# Altium PCB YAPCBBC_draft_placement.PcbDoc
Units mm, origin at the board's own origin, x right, y up, seen from the top; angles counter-clockwise.
Board outline 84 x 55 mm, 2 copper layers (Top Layer, Bottom Layer); 35 components, 23 nets, 103 pads, 7 vias.
Unrouted connection lines stored in the file: 64.
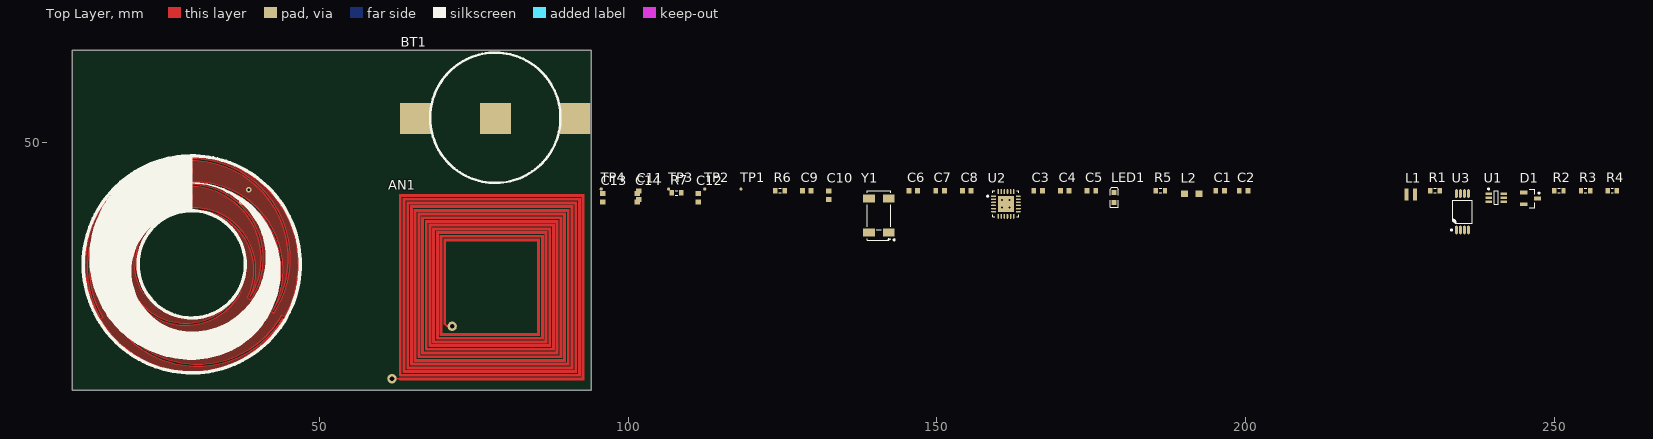
[diagram p0: Top Layer view]
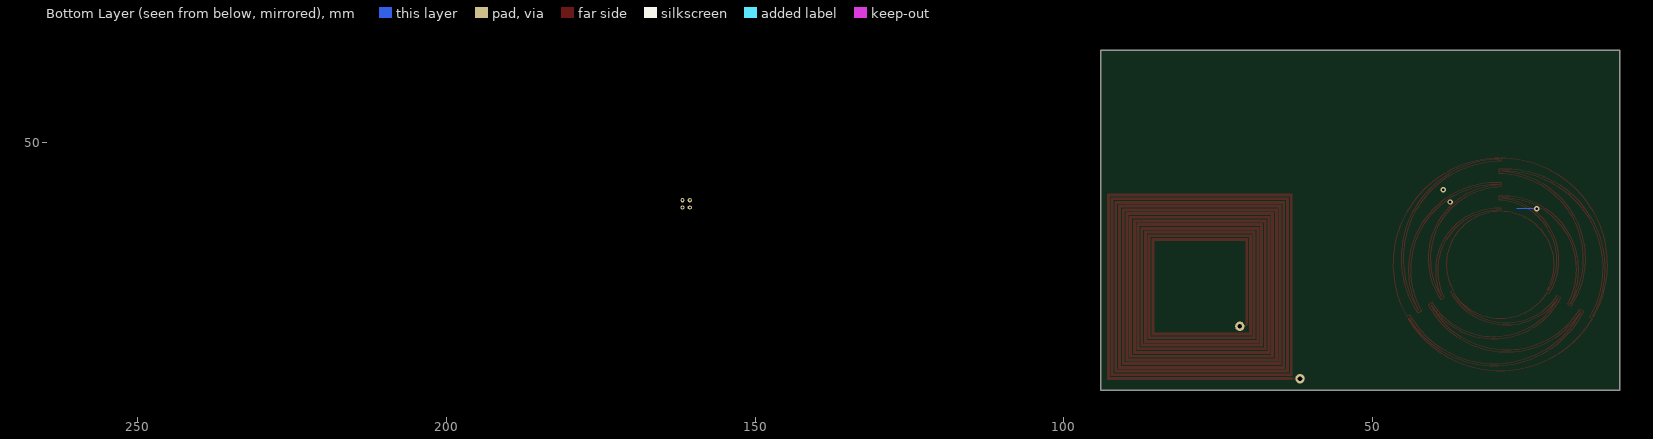
[diagram p1: Bottom Layer view, seen from below]

## Layer stack, top to bottom
Top Solder: solder mask 0.0102, Solder Resist, Dk 3.5
Top Layer: signal copper 0.0356
Dielectric 1: dielectric 0.32, FR-4, Dk 4.8
Bottom Layer: signal copper 0.0356
Bottom Solder: solder mask 0.0102, Solder Resist, Dk 3.5

## Board outline
10,10 94,10 94,65 10,65

## Design rules (kind name [scope] priority, off if disabled: settings)
Clearance [All] p1: gap=0.254
PolygonConnect [All] p1: connectstyle=Relief reliefconductorwidth=0.254 reliefentries=4 polygonreliefangle="90 Angle" airgapwidth=0.254
RoutingVias [All] p1: holewidth=0.711 width=1.27 viastyle="Through Hole" minholewidth=0.711 minwidth=1.27 maxholewidth=0.711 maxwidth=1.27
SolderMaskExpansion [All] p1: expansion=0.102
Width [All] p1: maxlimit=0.254 minlimit=0.254 preferedwidth=0.254
30 further rules are at their usual default settings.

## Components (designator, comment, footprint, x,y, rotation, side; value= is the part's Value field where it differs from the comment)
AN1 "NFC Antenna" NFC_Antenna 62.992,11.684 r0 top
BT1 "Battery" BC-2001 91.436,53.975 r180 top
C1 "Cap" 1608[0603] 195.834,42.291 r0 top
C2 "Cap" 1608[0603] 199.644,42.291 r0 top
C3 "Cap" 1608[0603] 166.37,42.291 r0 top
C4 "Cap" 1608[0603] 170.688,42.291 r0 top
C5 "Cap" 1608[0603] 175.006,42.291 r0 top
C6 "Cap" 1608[0603] 146.177,42.291 r0 top
C7 "Cap" 1608[0603] 150.495,42.291 r0 top
C8 "Cap" 1608[0603] 154.813,42.291 r0 top
C9 "Cap" 1608[0603] 128.905,42.291 r0 top
C10 "Cap" 1608[0603] 132.461,41.529 r90 top
C11 "Cap" 1608[0603] 101.727,41.529 r90 top
C12 "Cap" 1608[0603] 111.379,41.148 r90 top
C13 "Cap" 1608[0603] 95.885,41.148 r90 top
C14 "Cap" 1608[0603] 101.473,41.148 r90 top
D1 "Schottky" SOT23_N 246.126,41.021 r0 top
L1 "Inductor" VLS2010E 226.695,41.656 r0 top
L2 "600 Ohm" "SMD 0805" 191.262,41.783 r0 top
LED1 "150060RS75000" LED_0603_Red 178.689,41.148 r90 top
R1 "Res1" J1-0603 230.632,42.291 r0 top
R2 "Res1" J1-0603 250.698,42.291 r0 top
R3 "Res1" J1-0603 255.016,42.291 r0 top
R4 "Res1" J1-0603 259.334,42.291 r0 top
R5 "Res1" J1-0603 186.182,42.291 r0 top
R6 "Res1" J1-0603 124.587,42.291 r0 top
R7 "Res1" J1-0603 107.823,41.91 r0 top
TP1 "TESTPOINT" TP-R20 118.237,42.545 r90 top
TP2 "TESTPOINT" TP-R20 112.395,42.545 r90 top
TP3 "TESTPOINT" TP-R20 106.553,42.545 r90 top
TP4 "TESTPOINT" TP-R20 95.631,42.545 r90 top
U1 "TLV61225DCKT" DCK0006A_M 240.538,41.148 r0 top
U2 "MSP430FR2532IRGET" RGE24_N 161.163,40.132 r0 top
U3 "M24SR04-Y" "ST TSSOP-8" 235.077,38.862 r90 top
Y1 "32.768kHz" "ABRACON ABS25" 140.589,38.227 r90 top

## Footprints (in the part's own frame and the unit in brackets; to place one, negate y for a bottom-side part, rotate by r counter-clockwise, add the part's x,y. Pads: shape width x height; smd on the part's side, far side on the other; paste and mask are expansions set on the pad)
1608[0603] [mm] "Chip Capacitor, Body 1.6x0.8mm, IPC High Density"
  rect 0.8x0.9 smd: 1(-0.7,0) 2(0.7,0)
  body extent -0.87,-0.48 0.87,0.48, height 1.3
"ABRACON ABS25" [mm]
  rect 1.3x1.9 smd: 1(-2.75,-1.6) 2(2.75,-1.6) 3(2.75,1.6) 4(-2.75,1.6)
  silkscreen extent -4.02,-2.61 4,1.9, body extent -4,-1.9 4,1.9, height 2.5
BC-2001 [mm]
  rect 5x5 smd paste-25.4 mask-25.4: +(0,0) -(12.95,0)
  rect 5x5 smd mask-25.4: +(25.9,0)
  silkscreen extent 2.4,-10.65 23.5,10.45
DCK0006A_M [mm] "SOT23, 6-Leads, Body 2.15x1.4mm, Pitch 0.65mm, IPC Low Density"
  rrect22% 1.05x0.45 smd: 1(-1.225,0.65) 2(-1.225,0) 3(-1.225,-0.65) 4(1.225,-0.65) 5(1.225,0) 6(1.225,0.65)
  silkscreen extent -1.35,-1.1 0.3,1.55, body extent -1.14,-1 1.14,1, height 0.94
J1-0603 [mm] "Chip Resistor, Body 1.6x0.8mm, IPC High Density"
  rect 0.7x0.9 smd: 1(-0.75,0) 2(0.75,0)
  silkscreen extent -0.2,-0.35 0.2,0.35, body extent -0.85,-0.48 0.85,0.48, height 0.9
LED_0603_Red [mm] "Chip LED, 2-Leads, Body 1.6x0.8mm, IPC Medium Density"
  rect 0.8x0.8 smd: 1(-0.8,0) 2(0.8,0)
  silkscreen extent -1.52,-0.64 1.65,0.64, body extent -0.8,-0.4 0.8,0.4, height 0.7
NFC_Antenna [mil] "L=5.51 uH, tuned for 13.56 MHz"
  round 60 hole 30: AC0(335,340) AC1(-49.09,5.91)
  Top Layer region: 0,0 0,11.81 1165.35,11.81 1165.35,1169.29 11.81,1169.29 11.81,35.43 1141.73,35.43 1141.73,1145.67 35.43,1145.67 35.43,59.06 1118.11,59.06 1118.11,1122.05 59.06,1122.05 59.06,82.68 1094.49,82.68 1094.49,1098.43 82.68,1098.43 82.68,106.3 1070.87,106.3 1070.87,1074.8 106.3,1074.8 106.3,129.92 1047.24,129.92 1047.24,1051.18 129.92,1051.18 129.92,153.54 1023.62,153.54 1023.62,1027.56 153.54,1027.56 153.54,177.17 1000,177.17 1000,1003.94 177.17,1003.94 177.17,200.79 976.38,200.79 976.38,980.32 200.79,980.32 200.79,224.41 952.76,224.41 952.76,956.69 224.41,956.69 224.41,248.03 929.13,248.03 929.13,933.07 248.03,933.07 248.03,271.65 905.51,271.65 905.51,909.45 271.65,909.45 271.65,295.28 881.89,295.28 881.89,885.83 295.28,885.83 295.28,354.33 283.46,354.33 283.46,897.64 893.7,897.64 893.7,283.46 259.84,283.46 259.84,921.26 917.32,921.26 917.32,259.84 236.22,259.84 236.22,944.88 940.94,944.88 940.94,236.22 212.6,236.22 212.6,968.5 964.57,968.5 964.57,212.6 188.98,212.6 188.98,992.13 988.19,992.13 988.19,188.98 165.35,188.98 165.35,1015.75 1011.81,1015.75 1011.81,165.35 141.73,165.35 141.73,1039.37 1035.43,1039.37 1035.43,141.73 118.11,141.73 118.11,1062.99 1059.06,1062.99 1059.06,118.11 94.49,118.11 94.49,1086.61 1082.68,1086.61 1082.68,94.49 70.87,94.49 70.87,1110.24 1106.3,1110.24 1106.3,70.87 47.24,70.87 47.24,1133.86 1129.92,1133.86 1129.92,47.24 23.62,47.24 23.62,1157.48 1153.54,1157.48 1153.54,23.62 0,23.62 0,1181.1 1177.17,1181.1 1177.17,0
  Top Layer lines w0.5: 0,0 0,5.91 0,11.81 1165.35,11.81 1165.35,1169.29 11.81,1169.29 11.81,35.43 1141.73,35.43 1141.73,1145.67 35.43,1145.67 35.43,59.06 1118.11,59.06 1118.11,1122.05 59.06,1122.05 59.06,82.68 1094.49,82.68 1094.49,1098.43 82.68,1098.43 82.68,106.3 1070.87,106.3 1070.87,1074.8 106.3,1074.8 106.3,129.92 1047.24,129.92 1047.24,1051.18 129.92,1051.18 129.92,153.54 1023.62,153.54 1023.62,1027.56 153.54,1027.56 153.54,177.17 1000,177.17 1000,1003.94 177.17,1003.94 177.17,200.79 976.38,200.79 976.38,980.32 200.79,980.32 200.79,224.41 952.76,224.41 952.76,956.69 224.41,956.69 224.41,248.03 929.13,248.03 929.13,933.07 248.03,933.07 248.03,271.65 905.51,271.65 905.51,909.45 271.65,909.45 271.65,295.28 881.89,295.28 881.89,885.83 295.28,885.83 295.28,354.33 290.67,354.33 289.37,354.33 283.46,354.33 283.46,897.64 893.7,897.64 893.7,283.46 259.84,283.46 259.84,921.26 917.32,921.26 917.32,259.84 236.22,259.84 236.22,944.88 940.94,944.88 940.94,236.22 212.6,236.22 212.6,968.5 964.57,968.5 964.57,212.6 188.98,212.6 188.98,992.13 988.19,992.13 988.19,188.98 165.35,188.98 165.35,1015.75 1011.81,1015.75 1011.81,165.35 141.73,165.35 141.73,1039.37 1035.43,1039.37 1035.43,141.73 118.11,141.73 118.11,1062.99 1059.06,1062.99 1059.06,118.11 94.49,118.11 94.49,1086.61 1082.68,1086.61 1082.68,94.49 70.87,94.49 70.87,1110.24 1106.3,1110.24 1106.3,70.87 47.24,70.87 47.24,1133.86 1129.92,1133.86 1129.92,47.24 23.62,47.24 23.62,1157.48 1153.54,1157.48 1153.54,23.62 0,23.62 0,1181.1 1177.17,1181.1 1177.17,0 0,0
  Top Layer lines w11.81: -49.09,5.91 0,5.91 ; 289.37,354.33 290.67,354.33 305,340 335,340
RGE24_N [mm] "24-Pin Plastic Quad Flat No-Lead 0.5 mm Pitch, IPC Medium Density"
  oval 0.8x0.25 smd: 1(-2,1.25) 2(-2,0.75) 3(-2,0.25) 4(-2,-0.25) 5(-2,-0.75) 6(-2,-1.25) 13(2,-1.25) 14(2,-0.75) 15(2,-0.25) 16(2,0.25) 17(2,0.75) 18(2,1.25)
  oval 0.25x0.8 smd: 7(-1.25,-2) 8(-0.75,-2) 9(-0.25,-2) 10(0.25,-2) 11(0.75,-2) 12(1.25,-2) 19(1.25,2) 20(0.75,2) 21(0.25,2) 22(-0.25,2) 23(-0.75,2) 24(-1.25,2)
  rect 2.6x2.6 smd: 25(0,0)
  silkscreen extent -3.07,-2.1 2.1,2.1, body extent -2.07,-2.07 2.07,2.07, height 1
"SMD 0805" [mm] "Chip Inductor, 2-Leads, Body 2,0x1,2mm"
  rect 1.15x1 smd: 1(-1.175,0) 2(1.175,0)
  body extent -1,-0.6 1,0.6, height 0.89
SOT23_N [mm] "SOT23, 3-Leads, Body 2.9x1.3mm, Pitch 0.95mm, Lead Span 2.3mm - Reverse Pinning, IPC Medium Density"
  rect 1.15x0.6 smd: 1(1.125,0) 2(-1.125,-0.95) 3(-1.125,0.95)
  silkscreen extent -0.2,-1.5 1.48,1.5, body extent -0.7,-1.5 0.7,1.5, height 1.1
"ST TSSOP-8" [mm] "TSSOP, 8-Leads, Body 3.00x4.40mm, Pitch 0.65mm, IPC Medium Density"
  oval 1.4x0.45 smd: 1(-2.95,0.975) 2(-2.95,0.325) 3(-2.95,-0.325) 4(-2.95,-0.975) 5(2.95,-0.975) 6(2.95,-0.325) 7(2.95,0.325) 8(2.95,0.975)
  silkscreen extent -3.07,-1.55 1.85,1.87, body extent -3.21,-1.5 3.21,1.5, height 1.2
TP-R20 [mil]
  round 20 smd paste-30 mask+3: 1(0,0)
  body extent -11,-11 11,11
VLS2010E [mm] "Inductor"
  rect 0.65x2 smd: 1(-0.675,0) 2(0.675,0)
  body extent -0.99,-0.99 0.99,0.99, height 1

## Part data
AN1: library part NFC_Antenna, "L=5.51 uH, tuned for 13.56 MHz"
BT1: "Multicell Battery"
C1 C2 C3 C4 C5 C6 C7 C8 C9 C10 C11 C12 C13 C14: "Capacitor"
D1: library part "D Schottky", "Schottky Diode"
L2: library part "WE-CBF 0805, 742792042", "SMD EMI Suppression Ferrite Beads WE-CBF, Z= 600 Ohm"
LED1: library part "WL-SMCW 0603  150060RS75000", "SMD mono-color Chip LED, WL-SMCW, Red"
R1 R2 R3 R4 R5 R6 R7: "Resistor"
TP1 TP2 TP3 TP4: "SMD test pin"
U1: library part CMP-0343-00078-2, "Voltage Converter with 0.7 to 3.3 V Input, -40 to 85 degC, 6-Pin SC70 (DCK), Green (RoHS & no Sb/Br)"
U2: "MSP430 Captivate Microcontroller"
U3: "Dynamic NFC/RFID tag IC with 4-Kbit EEPROM,   NFC Forum Type 4 Tag and I²C interface"
Y1: library part "Abracon Crystal ABS25", "SMT Crystal"

## Via types
v1: diameter 0.66, hole 0.33, Top Layer to Bottom Layer, tented top, 4 vias
v2: diameter 0.878, hole 0.439, Top Layer to Bottom Layer, tented both sides, 3 vias

## Nets (pads, with @x,y where several pads share a name; then routed paths per layer and width w, separated by ;. In a path a pad name is that pad's centre, name@x,y a point inside that pad or via, vN(x,y) a via of type N, cw(c..) or ccw(c..) an arc to the next point about the centre after c; other vN are vias at no path point)
CAP0.2: U2.12
CAP0.3: U2.13
CAP1.2: U2.14
CAP1.3: U2.15
CAP2.0: U2.17
GND: BT1.- C1.1 C2.1 C3.1 C4.1 C5.1 C6.1 C7.1 C8.1 C9.1 C10.1 C11.1 C13.1 C14.1 LED1.2 R5.1 TP4.1 U1.3 U2.23 U2.25 U3.4
  other v1: 160.563,39.532 161.763,39.532 160.563,40.732 161.763,40.732
I2C_SCL: R3.1 U3.6
I2C_SDA: R2.1 U3.5
NetAN1_AC0: AN1.AC0 C12.1 C14.2 R7.1 U3.2
NetAN1_AC1: AN1.AC1 C12.2 C13.2 R7.2 U3.3
NetL1_2: L1.2 U1.5
NetLED1_1: LED1.1 R1.1
NFC_GPO: R4.1 U3.7
RF_DISABLE: R5.2 U3.1
SBWTCK: TP2.1 U2.2
SBWTDIO_RST: C11.2 R6.1 TP3.1 U2.1
VBAT: BT1.+ D1.1
VCC: C2.2 C6.2 C7.2 L2.1 R1.2 R2.2 R3.2 R4.2 R6.2 TP1.1 U1.2 U1.4 U2.24
VCC_F: C3.2 C4.2 C5.2 L2.2 U3.8
VIN: C1.2 D1.2 L1.1 U1.1 U1.6
VREG: C8.2 U2.16
XIN: C9.2 U2.22 Y1.1
XOUT: C10.2 U2.21 Y1.4
pads on no net: D1.3 U2.3 U2.4 U2.5 U2.6 U2.7 U2.8 U2.9 U2.10 U2.11 U2.18 U2.19 U2.20 Y1.2 Y1.3
copper on no net: | length 828
  Top Layer w0.13: 42.051,22.805 42.638,22.466
  Top Layer w0.173: 42.051,22.805 ccw(c29.914,29.477) 29.505,43.321 29.505,43.307 cw(c28.877,31.291) 38.895,24.627 38.33,24.957 ccw(c29.598,29.38) 29.505,39.168 29.505,38.991 cw(c29.332,30.348) 36.9,26.17 37.349,25.919 cw(c28.361,30.602) 20.049,24.802 ccw(c30.384,30.257) 40.364,24.178 40.94,23.846 cw(c28.287,30.279) 16.323,22.638 16.311,22.631 ccw(c30.269,29.962) 43.942,22.112 44.39,21.854 ccw(c29.332,30.348) 29.505,47.636 29.505,47.462 cw(c29.198,31.353) 42.638,22.466 ; 14.274,21.854 cw(c29.332,30.348) 29.159,47.636 29.159,47.119 cw(c29.198,31.353) 42.525,22.928 ccw(c29.93,29.478) 29.159,43.652 29.159,42.974 cw(c28.877,31.291) 38.776,25.081 ccw(c29.598,29.38) 29.159,39.506 29.159,38.991 ccw(c29.332,30.348) 21.757,26.184 21.606,26.09 cw(c30.049,31.044) 29.505,40.818 29.505,41.471 ccw(c28.754,29.462) 18.023,24.018 18.012,24.01 cw(c29.795,31.288) 29.505,45.135 29.505,45.812 ccw(c28.529,29.73) 14.425,21.941 14.274,21.854 ; 14.447,21.554 ccw(c29.332,30.348) 44.217,21.554 44.066,21.642 cw(c30.269,29.962) 15.853,22.766 16.44,23.104 ccw(c28.287,30.279) 40.481,23.713 cw(c30.384,30.257) 19.599,24.921 20.164,25.252 ccw(c28.361,30.602) 36.882,25.786 cw(c29.332,30.348) 21.778,25.791 21.488,25.62 cw(c30.049,31.044) 29.166,41.141 ccw(c28.754,29.462) 18.484,23.885 17.897,23.546 cw(c29.795,31.288) 29.159,45.469 29.159,45.483 ccw(c28.529,29.73) 14.895,21.813 14.447,21.554
  Bottom Layer w0.176: v2(23.404,39.35) 26.697,39.35
  other v2: 37.456,40.448 38.554,42.424

## Polygon pours and split planes (outlines as drawn)
no net on Top Layer "Top" (solid, remove dead copper, pour order 0): 14.372,21.51 cw(c14.447,21.554) 14.404,21.63 14.776,21.845 cw(c28.529,29.73) 29.163,45.57 cw(c29.159,45.483) 29.246,45.483 29.246,45.469 cw(c29.159,45.469) 29.163,45.382 ccw(c29.795,31.288) 17.925,23.663 18.368,23.918 cw(c28.754,29.462) 29.169,41.228 cw(c29.166,41.141) 29.253,41.141 cw(c29.166,41.141) 29.173,41.054 ccw(c30.049,31.044) 21.516,25.737 21.734,25.866 cw(c21.778,25.791) 21.734,25.866 cw(c21.778,25.791) 21.853,25.836 cw(c29.332,30.355) 21.853,25.836 ccw(c29.332,30.348) 36.808,25.831 ccw(c36.882,25.786) 36.807,25.828 36.808,25.831 cw(c36.882,25.786) 36.969,25.786 cw(c36.882,25.786) 36.957,25.741 36.958,25.743 cw(c28.361,30.602) 20.136,25.135 19.713,24.887 ccw(c30.384,30.257) 40.408,23.76 cw(c40.481,23.713) 40.481,23.8 cw(c40.481,23.713) 40.568,23.713 cw(c40.481,23.713) 40.557,23.672 cw(c28.287,30.279) 16.41,22.987 15.968,22.731 ccw(c30.269,29.962) 43.992,21.686 cw(c44.066,21.642) 44.066,21.728 cw(c44.066,21.642) 44.11,21.717 44.261,21.629 cw(c44.217,21.554) 44.304,21.554 cw(c44.217,21.554) 44.292,21.51 cw(c29.332,30.348)
no net on Top Layer "Top" (solid, remove dead copper, pour order 2): 14.198,21.811 ccw(c14.274,21.854) 14.317,21.779 14.468,21.866 ccw(c14.425,21.941) 14.512,21.941 ccw(c14.425,21.941) 14.501,21.983 cw(c28.529,29.73) 29.418,45.73 29.418,45.219 ccw(c29.795,31.288) 17.938,23.964 ccw(c18.012,24.01) 18.063,23.94 18.074,23.949 ccw(c18.023,24.018) 18.11,24.018 ccw(c18.023,24.018) 18.1,24.058 cw(c28.754,29.462) 29.418,41.389 29.418,40.9 ccw(c30.049,31.044) 21.531,26.046 ccw(c21.606,26.09) 21.652,26.017 21.802,26.109 ccw(c21.757,26.184) 21.844,26.184 ccw(c21.757,26.184) 21.833,26.226 ccw(c29.326,30.324) 21.833,26.225 21.833,26.226 cw(c29.332,30.348) 29.16,38.904 ccw(c29.159,38.991) 29.246,38.991 29.246,39.422 cw(c29.598,29.38) 39.646,29.38 cw(c29.598,29.38) 38.698,25.119 ccw(c38.776,25.081) 38.69,25.081 ccw(c38.776,25.081) 38.85,25.035 ccw(c28.877,31.291) 40.65,31.291 ccw(c28.877,31.291) 29.246,43.059 29.246,43.57 cw(c29.93,29.478) 44.039,29.478 cw(c29.93,29.478) 42.448,22.968 ccw(c42.525,22.928) 42.525,22.841 ccw(c42.525,22.928) 42.598,22.882 ccw(c29.198,31.353) 45.051,31.353 ccw(c29.198,31.353) 29.246,47.205 29.246,47.636 ccw(c29.159,47.636) 29.159,47.723 ccw(c29.159,47.636) 29.158,47.723 ccw(c29.332,30.348)
no net on Top Layer "Top" (solid, remove dead copper, pour order 4): 16.234,22.59 cw(c16.311,22.631) 16.267,22.706 16.28,22.713 cw(c16.323,22.638) 16.396,22.684 ccw(c28.287,30.279) 40.826,23.812 40.394,24.061 cw(c30.384,30.257) 19.972,24.762 cw(c20.049,24.802) 20.049,24.889 cw(c20.049,24.802) 20.12,24.852 ccw(c28.361,30.602) 37.233,25.885 36.858,26.095 cw(c36.9,26.17) 36.824,26.213 ccw(c29.332,30.348) 37.89,30.348 ccw(c29.332,30.348) 29.504,38.904 ccw(c29.351,30.369) 29.503,38.904 29.504,38.904 cw(c29.505,38.991) 29.418,38.991 29.418,39.168 cw(c29.505,39.168) 29.504,39.255 cw(c29.598,29.38) 39.473,29.38 cw(c29.598,29.38) 38.444,24.991 38.867,24.744 ccw(c28.877,31.291) 40.822,31.291 ccw(c28.877,31.291) 29.501,43.22 cw(c29.505,43.307) 29.418,43.307 29.418,43.321 cw(c29.505,43.321) 29.502,43.407 cw(c29.914,29.477) 43.851,29.477 cw(c29.914,29.477) 42.168,22.838 42.61,22.582 ccw(c29.198,31.353) 45.223,31.353 ccw(c29.198,31.353) 29.504,47.375 ccw(c29.16,31.354) 29.503,47.375 29.504,47.375 cw(c29.505,47.462) 29.418,47.462 29.418,47.636 cw(c29.505,47.636) 29.506,47.723 cw(c29.332,30.348) 46.708,30.348 cw(c29.332,30.348) 44.466,21.811 cw(c44.39,21.854) 44.39,21.767 cw(c44.39,21.854) 44.347,21.779 43.974,21.994 cw(c30.269,29.962)

## Silkscreen, mask and mechanical layers (free items; w line width, h text height)
Top Overlay:
  circle w0.549: c29.332,30.348 r8.679
  circle w0.549: c29.332,30.348 r17.574
  region: 29.332,14.978 cw(c29.332,31.446) 29.332,47.913 29.332,39.131 ccw(c29.332,29.25) 29.332,19.37 ccw(c29.332,31.446) 29.332,43.522 cw(c29.332,29.25)
  lines w0.22: 29.332,14.978 ccw(c29.332,29.25) 29.332,43.522 cw(c29.332,31.446) 29.332,19.37 cw(c29.332,29.25) 29.332,39.131 29.332,47.913 ccw(c29.332,31.446) 29.332,14.978
Mechanical 1:
  the board outline again, w0.254
Mechanical 18:
  circle w0.254: c32.131,33.147 r20.447
  circle w0.254: c32.131,33.147 r9.652